# Altium PCB PCB1.PcbDoc
Units mil, origin at the board's own origin, x right, y up, seen from the top; angles counter-clockwise.
Board outline 5556.33 x 2918 mil, 2 copper layers (Top Layer, Bottom Layer); 71 components, 30 nets, 194 pads, 10 vias.
Unrouted connection lines stored in the file: 40.
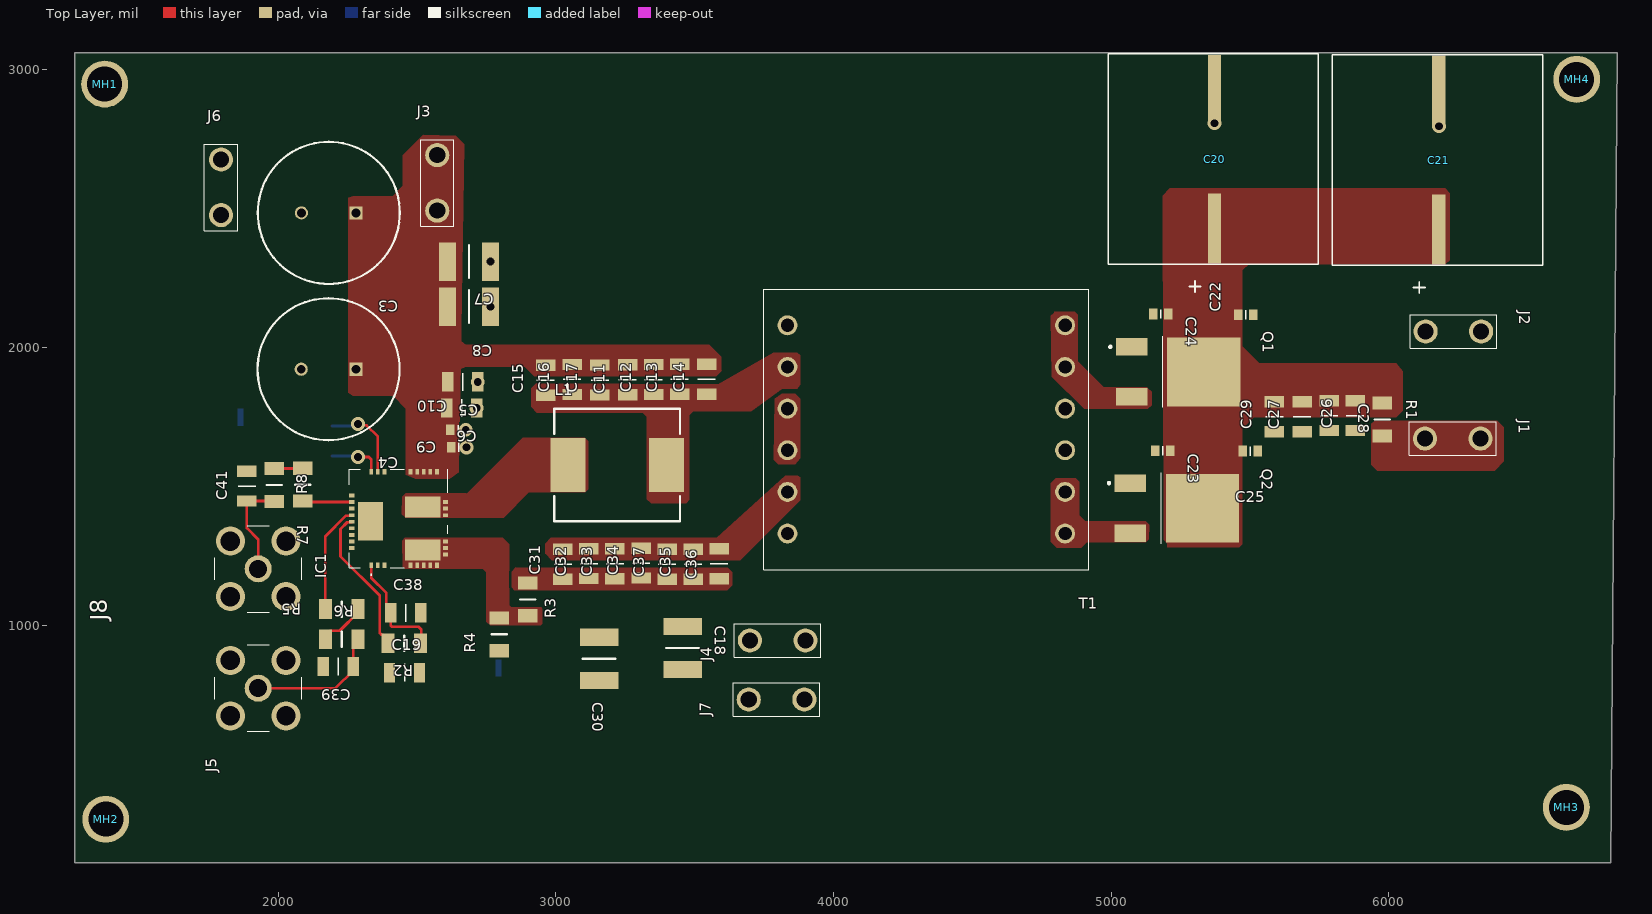
[diagram p0: Top Layer view]
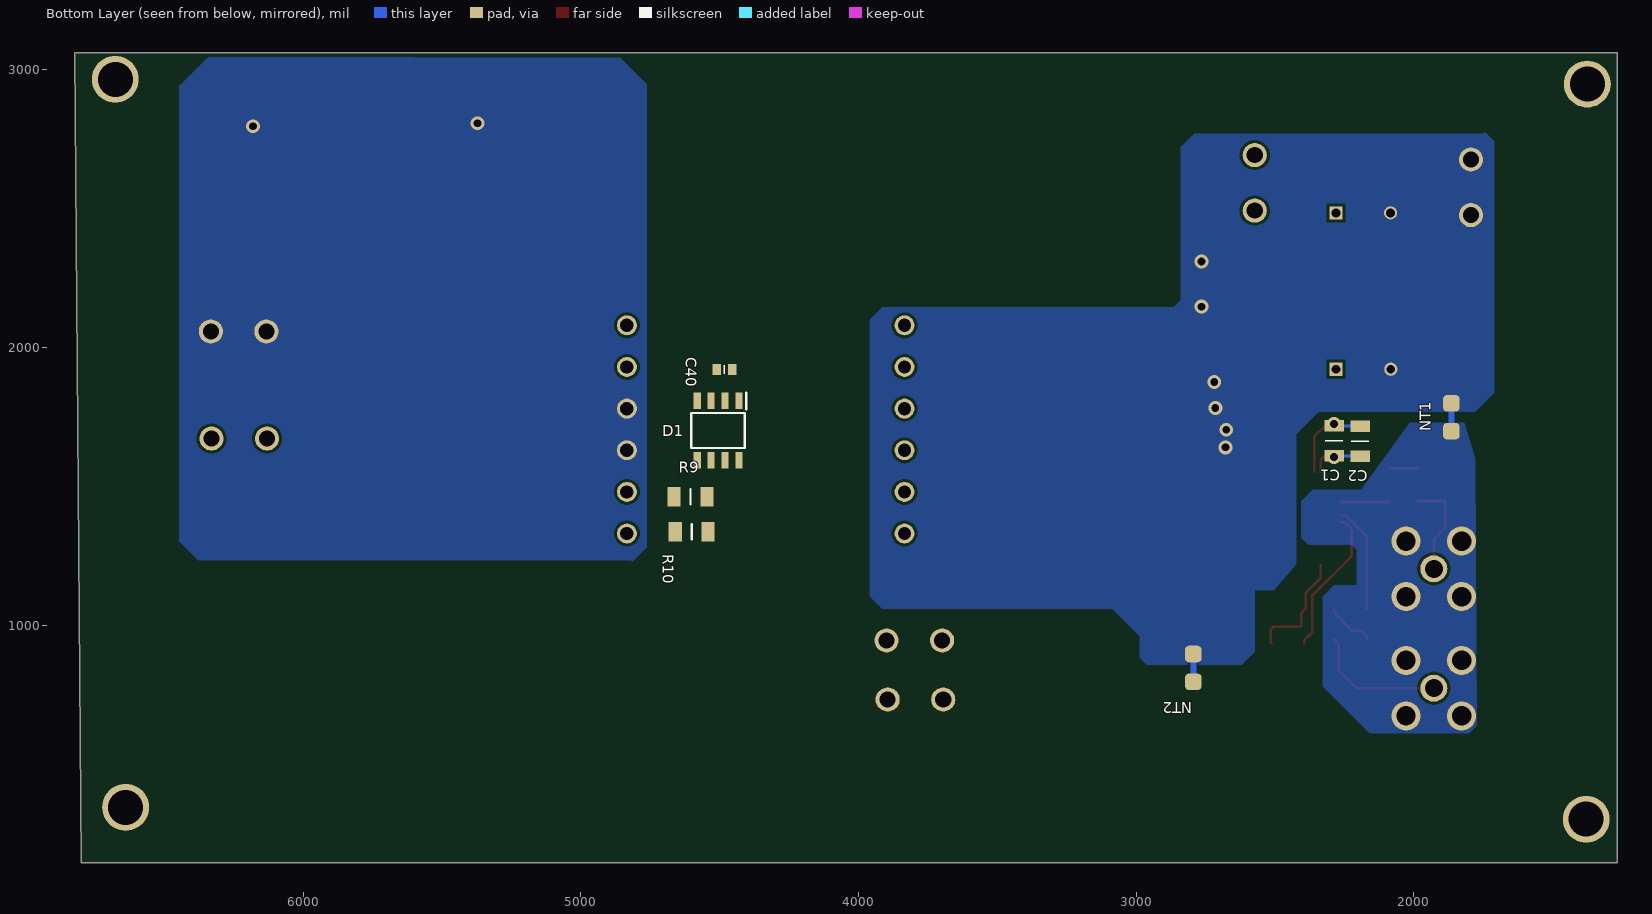
[diagram p1: Bottom Layer view, seen from below]

## Layer stack, top to bottom
Top Solder: solder mask 0.4, Solder Resist, Dk 3.5
Top Layer: signal copper 1.4
Dielectric 1: dielectric 12.6, FR-4, Dk 4.8
Bottom Layer: signal copper 1.4
Bottom Solder: solder mask 0.4, Solder Resist, Dk 3.5

## Board outline
1267,144 6799.56,144 6823.33,3062 1267,3062

## Design rules (kind name [scope] priority, off if disabled: settings)
Clearance [All] p1: gap=10 ignorepadtopadclearanceinfootprint=TRUE except(0: Arc-Hole Track-Hole SMDPad-Hole THPad-Hole Via-Hole Fill-Hole Poly-Hole Region-Hole Text-Hole)
PolygonConnect [All] p1: connectstyle=Direct reliefconductorwidth=10 reliefentries=4 polygonreliefangle="90 Angle" airgapwidth=10
RoutingVias [All] p1: holewidth=28 width=50 viastyle="Through Hole" minholewidth=28 minwidth=50 maxholewidth=28 maxwidth=50
SolderMaskExpansion [All] p1: expansion=4 istentingtop=FALSE
Width [All] p1: maxlimit=10 minlimit=10 preferedwidth=10
30 further rules are at their usual default settings.

## Components (designator, comment, footprint, x,y, rotation, side; value= is the part's Value field where it differs from the comment)
C1 "100n" Capcitor_1206 2287.19,1664 r90 bottom
C2 "100n" Capcitor_1206 2193.32,1663 r90 bottom
C3 "*" CAPPRD500W60D1300H2700 2280.6,2485 r180 top
C4 "*" CAPPRD500W60D1300H2700 2279.85,1921.84 r180 top
C5 "620p" Capcitor_1206 2665,1876.14 r180 top
C6 "620p" Capcitor_1206 2661,1782.28 r180 top
C7 "*" Capacitor_1812 2687,2309.56 r180 top
C8 "*" Capacitor_1812 2687,2147.19 r180 top
C9 "*" Capacitor_0805 2651,1640.6 r180 top
C10 "*" Capacitor_0805 2648,1703.76 r180 top
C11 "620p" Capcitor_1206 3258.49,1883.88 r90 top
C12 "620p" Capcitor_1206 3352.36,1884.74 r90 top
C13 "620p" Capcitor_1206 3446.23,1885.94 r90 top
C14 "620p" Capcitor_1206 3543.36,1885.94 r90 top
C15 "620p" Capcitor_1206 2963.36,1881.94 r90 top
C16 "620p" Capcitor_1206 3058.36,1884.94 r90 top
C17 "620p" Capcitor_1206 3158.36,1882.94 r90 top
C18 "10u" Capacitor_1812 3456.56,918 r270 top
C19 "100n" Capcitor_1206 2455.06,829 r0 top
C20 "*" Capacitor_Electrolytic_Vib_Res 5372.75,2680 r90 top
C21 "*" Capacitor_Electrolytic_Vib_Res 6180,2677 r90 top
C22 "*" Capacitor_0805 5485,2118 r180 top
C23 "*" Capacitor_0805 5186,1628 r0 top
C24 "*" Capacitor_0805 5179,2121 r0 top
C25 "*" Capacitor_0805 5501,1626.88 r180 top
C26 "620p" Capcitor_1206 5878.87,1755 r90 top
C27 "620p" Capcitor_1206 5688,1751 r90 top
C28 "620p" Capcitor_1206 5785,1755 r90 top
C29 "620p" Capcitor_1206 5588,1751 r90 top
C30 "10u" Capacitor_1812 3156,879 r90 top
C31 "620p" Capcitor_1206 3025.26,1219.75 r90 top
C32 "620p" Capcitor_1206 3119.12,1221.81 r90 top
C33 "620p" Capcitor_1206 3212.99,1221.75 r90 top
C34 "620p" Capcitor_1206 3306.86,1223.75 r90 top
C35 "620p" Capcitor_1206 3494.6,1219.75 r90 top
C36 "620p" Capcitor_1206 3588.47,1220.69 r90 top
C37 "620p" Capcitor_1206 3400.73,1219.75 r90 top
C38 "100n" Capcitor_1206 2459,1044 r0 top
C39 "100n" Capcitor_1206 2216.63,851.21 r180 top
C40 "*" Capacitor_0805 4483,1921 r180 bottom
C41 "100n" Capcitor_1206 1887,1501 r90 top
D1 "SRK2001A" SOIC127P600X175-8N 4506,1701 r270 bottom
IC1 "MASTERGAN1" MASTERGAN1 2433.69,1384.33 r90 top
J1 "1289-STR" 1289STR 6130.58,1672 r0 top
J2 "1289-STR" 1289STR 6133,2058 r0 top
J3 "1289-STR" 1289STR 2573,2493 r90 top
J4 "1289-STR" 1289STR 3899,945 r180 top
J5 "142-0701-301" 1420701301 1928,773 r180 top
J6 "1289-STR" 1289STR 1794.21,2477 r90 top
J7 "1289-STR" 1289STR 3895,732.23 r180 top
J8 "142-0701-301" 1420701301 1928,1203 r180 top
L1 "75uH" FP-IHLP-4040ED-FP_3_175x4-MFG 3221,1577 r0 top
MH1 "Mounting_Hole_M3" Mounting_Hole_M3 1375,2949 r180 top
MH2 "Mounting_Hole_M3" Mounting_Hole_M3 1379,301 r0 top
MH3 "Mounting_Hole_M3" Mounting_Hole_M3 6640,344 r0 top
MH4 "Mounting_Hole_M3" Mounting_Hole_M3 6677.13,2966 r0 top
NT1 "*" "Net tie" 1865,1699 r90 bottom net-tie
NT2 "*" "Net tie" 2794,896 r270 bottom net-tie
Q1 "STD95N4F3" STD95N4F3 5426.52,1912.01 r270 top
Q2 "STD95N4F3" STD95N4F3 5421.52,1421 r270 top
R1 "0" Resistor_1206 5977.07,1741 r270 top
R2 "0" Resistor_1206 2454,935 r0 top
R3 "0" Resistor_1206 2899,1093 r90 top
R4 "0" Resistor_1206 2796,967 r90 top
R5 "0" Resistor_1206 2228.84,1058 r180 top
R6 "4.7k" Resistor_1206 2228.84,949.41 r180 top
R7 "0" Resistor_1206 2088,1506 r270 top
R8 "4.7k" Resistor_1206 1985.47,1505 r90 top
R9 "100" Resistor_1206 4605,1462 r180 bottom
R10 "100" Resistor_1206 4601.06,1336 r0 bottom
T1 "MTPL-2516-S24V" MTPL2516S24V 3834.38,2080 r0 top

## Footprints (in the part's own frame and the unit in brackets; to place one, negate y for a bottom-side part, rotate by r counter-clockwise, add the part's x,y. Pads: shape width x height; smd on the part's side, far side on the other; paste and mask are expansions set on the pad)
1289STR [mm]
  round 2.205 hole 1.47: 1(0,0) 2(5.08,0)
  silkscreen extent -1.42,-1.53 6.5,1.53, body extent -1.42,-1.53 6.5,1.53, height 14.47
1420701301 [mil]
  round 97.52 hole 65: 1(0,0)
  round 105 hole 70: 2(-100,100) 3(-100,-100) 4(100,-100) 5(100,100)
  silkscreen extent -156,-156 156,156, body extent -150,-156 466,156, height 378
Capacitor_0805 [mm] "Capacitor - standard SMD"
  rect 0.78x0.99 smd: 1(-0.7,0) 2(0.7,0)
  silkscreen extent 0,-0.41 0,0.41, body extent -0.8,-0.41 0.8,0.41, height 0.9
Capacitor_1812 [mm] "Capacitor - Stnadard SMD"
  rect 1.56x3.52 smd: 1(-1.97,0) 2(1.97,0)
  silkscreen extent 0,-1.5 0,1.5, body extent -2.3,-1.6 2.3,1.6, height 2.8
Capacitor_Electrolytic_Vib_Res [mm] "Capacitor _ Electrolytic SMD"
  rect 6.4x1.2 smd: 1(-6.4,0) 2(6.3,0)
  silkscreen extent -12.19,-9.5 9.6,9.75, body extent -9,-8.75 9,9.25, height 21
Capcitor_1206 [mm] "Capacitor - Stnadard SMD"
  rect 1.04x1.78 smd: 1(-1.37,0) 2(1.37,0)
  silkscreen extent 0,-0.8 0,0.8, body extent -1.6,-0.8 1.6,0.8, height 0.95
CAPPRD500W60D1300H2700 [mm]
  rect 1.2x1.2 hole 0.8: 1(0,0)
  round 1.2 hole 0.8: 2(5,0)
  silkscreen extent -4,-6.5 9,6.5, body extent -4.23,-6.75 9.23,6.75, height 27
FP-IHLP-4040ED-FP_3_175x4-MFG [mil]
  rect 125x195 smd paste+0 mask+0: 1(-177.5,0) 2(177.5,0)
  silkscreen extent -226,-203 226,203, body extent -244,-207 244,207, height 10
MASTERGAN1 [mm]
  rect 0.5x0.35 smd: 1(-4.28,2.5) 2(-4.28,1.9) 3(-4.28,1.3) 4(-4.28,-1.1) 5(-4.28,-1.7) 6(-4.28,-2.3) 7(-4.28,-2.9) 8(-4.28,-3.5) 15(4.28,-3.5) 16(4.28,-2.9) 17(4.28,-2.3) 18(4.28,-1.7) 19(4.28,-1.1) 20(4.28,1.3) 21(4.28,1.9) 22(4.28,2.5)
  rect 0.35x0.5 smd: 9(-3.305,-4.29) 10(-2.705,-4.29) 11(-2.105,-4.29) 12(0.3,-4.29) 13(0.9,-4.29) 14(1.5,-4.29) 23(2.1,4.29) 24(1.5,4.29) 25(0.9,4.29) 26(0.3,4.29) 27(-0.3,4.29) 28(-0.9,4.29) 29(-1.5,4.29) 30(-2.1,4.29) 31(-2.7,4.29)
  rect 3.5x2.26 smd: MP1(-0.25,2.57)
  rect 1.9x3.25 smd: MP2(-2.88,-2.215) MP3(1.05,-2.215)
  silkscreen extent -5.2,-4.5 4.5,4.5, body extent -4.5,-4.5 4.5,4.5, height 1.1
Mounting_Hole_M3 [mil]
  round 169 hole 126: 1(0,0)
MTPL2516S24V [mil]
  round 71.81 hole 47.87: 1(0,0) 2(0,-150) 3(0,-300) 4(0,-450) 5(0,-600) 6(0,-750) 7(1000,-750) 8(1000,-600) 9(1000,-450) 10(1000,-300) 11(1000,-150) 12(1000,0)
  silkscreen extent -85,-880 1085,130, body extent -85,-880 1085,130, height 654
"Net tie" [mil] "Net tie - SMD short"
  rrect50% 60x60 smd: 1(0,0) 2(100,0)
  Top Layer region: 20,10 80,10 80,-10 20,-10 20,-10
Resistor_1206 [mm] "Resistor - Stnadard SMD"
  rect 1.2x1.8 smd: 1(-1.5,0) 2(1.5,0)
  silkscreen extent 0,-0.7 0,0.7, body extent -1.6,-0.8 1.6,0.8, height 0.75
SOIC127P600X175-8N [mm]
  rect 1.525x0.65 smd: 1(-2.712,1.905) 2(-2.712,0.635) 3(-2.712,-0.635) 4(-2.712,-1.905) 5(2.712,-1.905) 6(2.712,-0.635) 7(2.712,0.635) 8(2.712,1.905)
  silkscreen extent -3.47,-2.45 1.6,2.58, body extent -3,-2.45 3,2.45, height 1.75
STD95N4F3 [mm]
  rect 1.6x2.9 smd: 1(-2.286,-8.95) 2(2.286,-8.95)
  rect 6.3x6.7 smd: 3(0,-2.35)
  silkscreen extent -3.25,-11 3.25,-6.1, body extent -3.25,-6.1 3.25,0, height 4.5

## Part data
C1 C2 C5 C6 C11 C12 C13 C14 C15 C16 C17 C19 C26 C27 C28 C29 C31 C32 C33 C34 C35 C36 C37 C38 C39 C41: library part Capacitor_1206, "Capacitor - Standard SMD", Voltage="35 V"
  C1 C2 C19 C38 C39 C41: Capacitance=100n
  C5 C6 C11 C12 C13 C14 C15 C16 C17 C26 C27 C28 C29 C31 C32 C33 C34 C35 C36 C37: Capacitance=620p
C3 C4: library part Capacitor_Electrolytic_THT, "Capacitor - Electrolytic  THT"
C7 C8 C18 C30: library part Capacitor_1812, "Capacitor - Standard SMD"
  C18 C30: Capacitance=10u
C9 C10 C22 C23 C24 C25 C40: library part Capacitor_0805, "Capacitor - Standard SMD"
C20 C21: library part Capacitor_Electrolytic_Vib_Res, "Capacitor - Electrolytic  SMD"
D1: "Diode", Manufacturer_Name=STMicroelectronics, Mouser Part Number=511-SRK2001A, Arrow Part Number=SRK2001A, Arrow Price/Stock=https://www.arrow.com/en/products/srk2001a/stmicroelectronics, Datasheet Link=https://componentsearchengine.com/Datasheets/1/SRK2001A.pdf, Height=1.75mm, Manufacturer_Part_Number=SRK2001A, Mouser Price/Stock=https://www.mouser.co.uk/ProductDetail/STMicroelectronics/SRK2001A?qs=aVyJF2WnouTzNJDK1aOmdg%3D%3D
IC1: "Integrated Circuit", Manufacturer_Name=STMicroelectronics, Mouser Part Number=511-MASTERGAN1, Arrow Part Number=MASTERGAN1, Arrow Price/Stock=https://www.arrow.com/en/products/mastergan1/stmicroelectronics?region=nac, Datasheet Link=https://www.mouser.com/datasheet/2/389/mastergan1-1893186.pdf, Height=1mm, Manufacturer_Part_Number=MASTERGAN1, Mouser Price/Stock=https://www.mouser.co.uk/ProductDetail/STMicroelectronics/MASTERGAN1?qs=hWgE7mdIu5TUQlvSzk235A%3D%3D
J1 J2 J3 J4 J6 J7: "Connector", Manufacturer_Name="Keystone Electronics", Mouser Part Number=534-1289-STR, Datasheet Link=https://www.mouser.com/datasheet/2/215/Keystone_Electronics_12182018_1289-ST-1510776.pdf, Height=14.37mm, Manufacturer_Part_Number=1289-STR, Mouser Price/Stock=https://www.mouser.co.uk/ProductDetail/Keystone-Electronics/1289-STR?qs=0lSvoLzn4L%252BMUIbPVNHg8g%3D%3D
J5 J8: "Connector", Manufacturer_Name="Cinch Connectivity Solutions", Mouser Part Number=530-142-0701-301, Arrow Part Number=142-0701-301, Arrow Price/Stock=https://www.arrow.com/en/products/142-0701-301/cinch-connectivity-solutions?region=nac, Datasheet Link=https://datasheet.datasheetarchive.com/originals/distributors/Datasheets_SAMA/2ec9b041f970d014d2778887508fd87c.pdf, Height=9.779mm, Manufacturer_Part_Number=142-0701-301, Mouser Price/Stock=https://www.mouser.co.uk/ProductDetail/Johnson-Cinch-Connectivity-Solutions/142-0701-301?qs=VqHsQWpF6un5h9kBF%252BTxDw%3D%3D
L1: library part CMP-02424-000499-1, "Automotive Inductors, High Temperature (155 °C) Series 47uH 3.6A 127.87mΩ 20%"
NT1 NT2: library part "Net tie"
Q1 Q2: "MOSFET (N-Channel)", Manufacturer_Name=STMicroelectronics, Mouser Part Number=511-STD95N4F3, Arrow Part Number=STD95N4F3, Arrow Price/Stock=https://www.arrow.com/en/products/std95n4f3/stmicroelectronics, Datasheet Link=https://www.st.com/resource/en/datasheet/std95n4f3.pdf, Height=2.4mm, Manufacturer_Part_Number=STD95N4F3, Mouser Price/Stock=https://www.mouser.co.uk/ProductDetail/STMicroelectronics/STD95N4F3?qs=Djavi1aLnwoepdJqDxyf1g%3D%3D
R1 R2 R3 R4 R5 R6 R7 R8 R9 R10: library part Resistor_1206, "Resistor - Standard SMD"
  R1 R2 R3 R4 R5 R7: Resistance=0
  R6 R8: Resistance=4.7k
  R9 R10: Resistance=100
T1: "Transformer", Manufacturer_Name=Vishay, Mouser Part Number=70-MTPL-2516-S24V, Datasheet Link=https://componentsearchengine.com/Datasheets/2/MTPL-2516-S24V.pdf, Height=16.51mm, Manufacturer_Part_Number=MTPL-2516-S24V, Mouser Price/Stock=https://www.mouser.co.uk/ProductDetail/Vishay-Dale/MTPL-2516-S24V?qs=wd5RIQLrsJgVmtJW6evrjA%3D%3D

## Via types
v1: diameter 50, hole 28, Top Layer to Bottom Layer, 10 vias

## Nets (pads, with @x,y where several pads share a name; then routed paths per layer and width w, separated by ;. In a path a pad name is that pad's centre, name@x,y a point inside that pad or via, vN(x,y) a via of type N, cw(c..) or ccw(c..) an arc to the next point about the centre after c; other vN are vias at no path point)
DVS1: Q1.2 R9.1 T1.11 T1.12
DVS2: Q2.2 R10.2 T1.7 T1.8
GD1: D1.3 Q1.1
GD2: D1.8 Q2.1
L_GND: C39.2 C41.2 IC1.28 IC1.MP1 J5.2 J5.3 J5.4 J5.5 J8.2 J8.3 J8.4 J8.5 NT1.1
L_IN_T1: IC1.26 R5.2 | length 388.6
  Top Layer w10: R5.2 2169.78,1320.12 2244.08,1394.41 2263.06,1394.41 IC1.26
L_IN_T2: IC1.24 R7.2 | length 178.3
  Top Layer w10: R7.2 2091.56,1443.39 IC1.24
LINE: C3.1 C4.1 C5.2 C6.2 C7.2 C8.2 C9.2 C10.2 C11.2 C12.2 C13.2 C14.2 C15.2 C16.2 C17.2 IC1.15 IC1.16 IC1.17 IC1.18 IC1.19 J3.1 J3.2
NetC1_1: C1.1 C2.1 IC1.22 | length 190.4
  Top Layer w10: v1(2287,1606) 2326.18,1606 2335.27,1596.91 IC1.22
  Bottom Layer w10: C2.1 2286.19,1609.06 C1.1
NetC1_2: C1.2 C2.2 IC1.21 | length 311.5
  Top Layer w10: v1(2287,1725) 2292.28,1719.72 2318.28,1719.72 2358.89,1679.11 IC1.21
  Bottom Layer w10: C2.2 2286.19,1716.94 C1.2
NetC11_1: C11.1 C12.1 C13.1 C14.1 C15.1 C16.1 C17.1 L1.2 T1.2
NetC30_2: C30.2 C38.1 IC1.1 R2.2 | length 412
  Top Layer w10: IC1.1 2335.27,1169.67 2389.59,1115.35 2389.59,1059.47 C38.1 2405.06,999.82 2410.92,993.96 2506.41,993.96 2514.94,985.43 2514.94,936.88 R2.2
NetC31_1: C31.1 C32.1 C33.1 C34.1 C35.1 C36.1 C37.1 R3.2
NetC31_2: C31.2 C32.2 C33.2 C34.2 C35.2 C36.2 C37.2 T1.5
NetC39_1: C39.1 J5.1 R6.1 | length 488.9
  Top Layer w10: J5.1 2206.93,773 2270.57,836.64 C39.1 2270.57,932.08 R6.1
NetC41_1: C41.1 J8.1 R8.1 | length 360
  Top Layer w10: J8.1 1928,1308.64 1887,1349.64 C41.1 1984.35,1447.06 R8.1
NetD1_5: D1.5 R9.2
NetD1_6: D1.6 R10.1
NetIC1_4: IC1.4 IC1.5 IC1.6 IC1.7 IC1.8 IC1.9 IC1.10 IC1.11 IC1.MP2 R3.1 R4.2
NetIC1_12: IC1.12 IC1.13 IC1.14 IC1.MP3 L1.1
NetIC1_23: IC1.23 IC1.29 IC1.30 IC1.31
NetR5_1: R5.1 R6.2 | length 176.9
  Top Layer w10: R6.2 2169.78,961.22 2188.4,979.84 2221.54,979.84 2287.89,1046.19 R5.1
NetR7_1: R7.1 R8.2 | length 102.9
  Top Layer w10: R8.2 2087,1564.06 R7.1
NetT1_3: T1.3 T1.4
O_GND: C20.2 C21.2 C22.1 C23.1 C24.1 C25.1 C26.1 C27.1 C28.1 C29.1 J2.1 J2.2 T1.9 T1.10
  other v1: 6181,2797 5372,2808
O_U: J1.1 J1.2 R1.2
PVCC: C18.1 C19.1 C40.2 D1.1 IC1.27 J4.1 J4.2 R2.1 | length 536.2
  Top Layer w10: IC1.27 2263.06,1370.79 2248.74,1370.79 2224,1346.05 2224,1247.86 2366,1105.86 2366,971.29 2371.86,965.43 2376.32,965.43 2394.94,946.81 R2.1
PWR_GND: C3.2 C4.2 C5.1 C6.1 C7.1 C8.1 C9.1 C10.1 J6.1 J6.2 NT1.2 NT2.1 R4.1
  other v1: 2678.56,1640.6 2675.56,1703.76 2714.94,1782.28 2718.94,1876.14 2764.56,2147.19 2764.56,2309.56
SVS1: C20.1 C21.1 C22.2 C23.2 C24.2 C25.2 C26.2 C27.2 C28.2 C29.2 D1.4 D1.7 Q1.3 Q2.3 R1.1
Vcc_GND: C18.2 C19.2 C30.1 C38.2 C40.1 D1.2 IC1.3 J7.1 J7.2 NT2.2
pads on no net: IC1.2 IC1.20 IC1.25 MH1.1 MH2.1 MH3.1 MH4.1 T1.1 T1.6

## Polygon pours and split planes (outlines as drawn)
LINE on Top Layer "LINE_L01_P000" (solid, pour order 0): 2522,2766 2449,2693 2449,2582 2412,2545 2268,2545 2252,2540 2252,1837 2268,1826 2414,1826 2460,1780 2460,1541.7 2494.48,1526.5 2617.26,1526.5 2649.92,1550.36 2671,2732 2640,2763
O_U on Top Layer "O_U_L01_P023" (solid, pour order 23): 6391,1737 6415,1713 6415,1590 6381,1556 5959,1556 5937,1578 5937,1725 5949,1737
SVS1 on Top Layer "SVS1_L01_P021" (solid, pour order 21): 6050,1915 6027,1943 5533,1943 5472,2004 5449,1981 5449,1687 5450,1686 5513,1749 6386,1749 6027,1749 6050,1772
SVS1 on Top Layer "SVS1_L01_P020" (solid, pour order 20): 5189,1307 5202,1294 5202,1280 5461,1280 5473,1292 5473,2278 5495,2300 6206,2300 6206,2301 6220,2315 6220,2556 6203,2573 5212,2573 5186,2547
DVS1 on Top Layer "DVS1_L01_P019" (solid, pour order 19): 4783.3,2114.3 4795,2126 4795,2129 4869,2129 4880,2118 4880,1950 4973,1857 5131,1857 5131,1856 5146,1841 5146,1793 5132,1779 4903,1779 4786.65,1895.35
DVS2 on Top Layer "DVS2_L01_P018" (solid, pour order 18): 5137,1361 5124,1374 4907,1374 4885,1396 4885,1516 4872,1529 4800,1529 4782,1511 4782,1301 4804,1279 4893,1279 4912,1298 5125,1298 5136,1309
NetT1_3 on Top Layer "NETT1_3_L01_P017" (solid, pour order 17): 3788,1815 3814,1833 3862,1833 3880,1815 3880,1601 3862,1579 3802,1579 3785.5,1595.5
NetIC1_4 on Top Layer "NETIC1_4_L01_P011" (solid, pour order 11): 2446.94,1304.94 2456,1314 2809,1314 2832,1291 2832,1072 2840,1064 2947,1064 2951,1060 2951,1005 2945,999 2763,999 2750,1012 2750,1016 2750,1190 2736,1204 2455,1204 2448,1211
NetC31_1 on Top Layer "NETC31_1_L01_P008" (solid, pour order 8): 3619,1206 3635,1190 3635,1144 3617,1126 2851,1126 2841,1136 2841,1193 2856,1208
NetC11_1 on Top Layer "NETC11_1_L01_P002" (solid, pour order 2): 3582,1865.55 3782.49,1980.98 3869,1980.98 3880,1972 3880,1865.55 3869,1852 3816.18,1852 3703,1770 3582,1770
NetC31_2 on Top Layer "NETC31_2_L01_P007" (solid, pour order 7): 2962,1257 2963,1257 2986,1234 3665,1234 3881,1450 3881,1532.62 3870.56,1538.5 3825.5,1538.5 3580,1314 2982,1314 2962,1294
NetIC1_12 on Top Layer "NETIC1_12_L01_P006" (solid, pour order 6): 2446,1462 2459,1475 2678,1475 2679,1474 2880,1675 3104,1675 3117,1662 3117,1489 3106,1478 2903,1478 2812,1387 2457,1387 2457,1388 2445,1400
LINE on Top Layer "LINE_L01_P005" (solid, pour order 5): 2650.9,1918.95 2675,1931 2888,1931 2922,1897 3577,1897 3597,1917 3596,1918 3596,1967 3553,2010 2675,2010 2653,2027
NetC11_1 on Top Layer "NETC11_1_L01_P001" (solid, pour order 1): 2929,1871 2911,1853 2911,1786 2932,1765 3313,1765 3328,1750 3328,1454 3343,1439 3469,1439 3481,1451 3481,1756 3495,1770 3592,1770 3604,1782 3604,1854 3602,1854 3589,1867
O_GND on Bottom Layer "O_GND_L02_P024" (solid, pour order 24): 4858,3043 4763,2948 4763,1280 4815,1228 4820,1233 6378,1233 6450,1305 6446,1309 6446,2944 6444,2944 6341,3047
L_GND on Bottom Layer "L_GND_L02_P016" (solid, pour order 16): 1779.27,1600.27 1818.21,1729 2015.22,1729 2190.12,1488 2364,1488 2405,1447 2405,1315 2380,1290 2220,1290 2220,1286 2206,1272 2206,1143 2287,1143 2328,1102 2328,780 2159,611 1800,611 1772.84,638.16
PWR_GND on Bottom Layer "PWR_GND_L02_P014" (solid, pour order 14): 1710,2743 1743,2776 1749,2770 2790,2770 2839,2721 2839,2171 2865,2145 3914,2145 3959,2100 3959,1104 3914,1059 3086,1059 2987,960 2987,883 2962,858 2619,858 2573,904 2573,1125 2504,1125 2424,1220 2424,1687 2342,1769 1778,1769 1710,1837